# Altium PCB chipshouter-pico-panel.PcbDoc
Units mil, origin at the board's own origin, x right, y up, seen from the top; angles counter-clockwise.
Board outline 7944.88 x 5314.96 mil, 2 copper layers (Top Layer, Bottom Layer); 9 components, 0 nets, 64 pads, 0 vias.
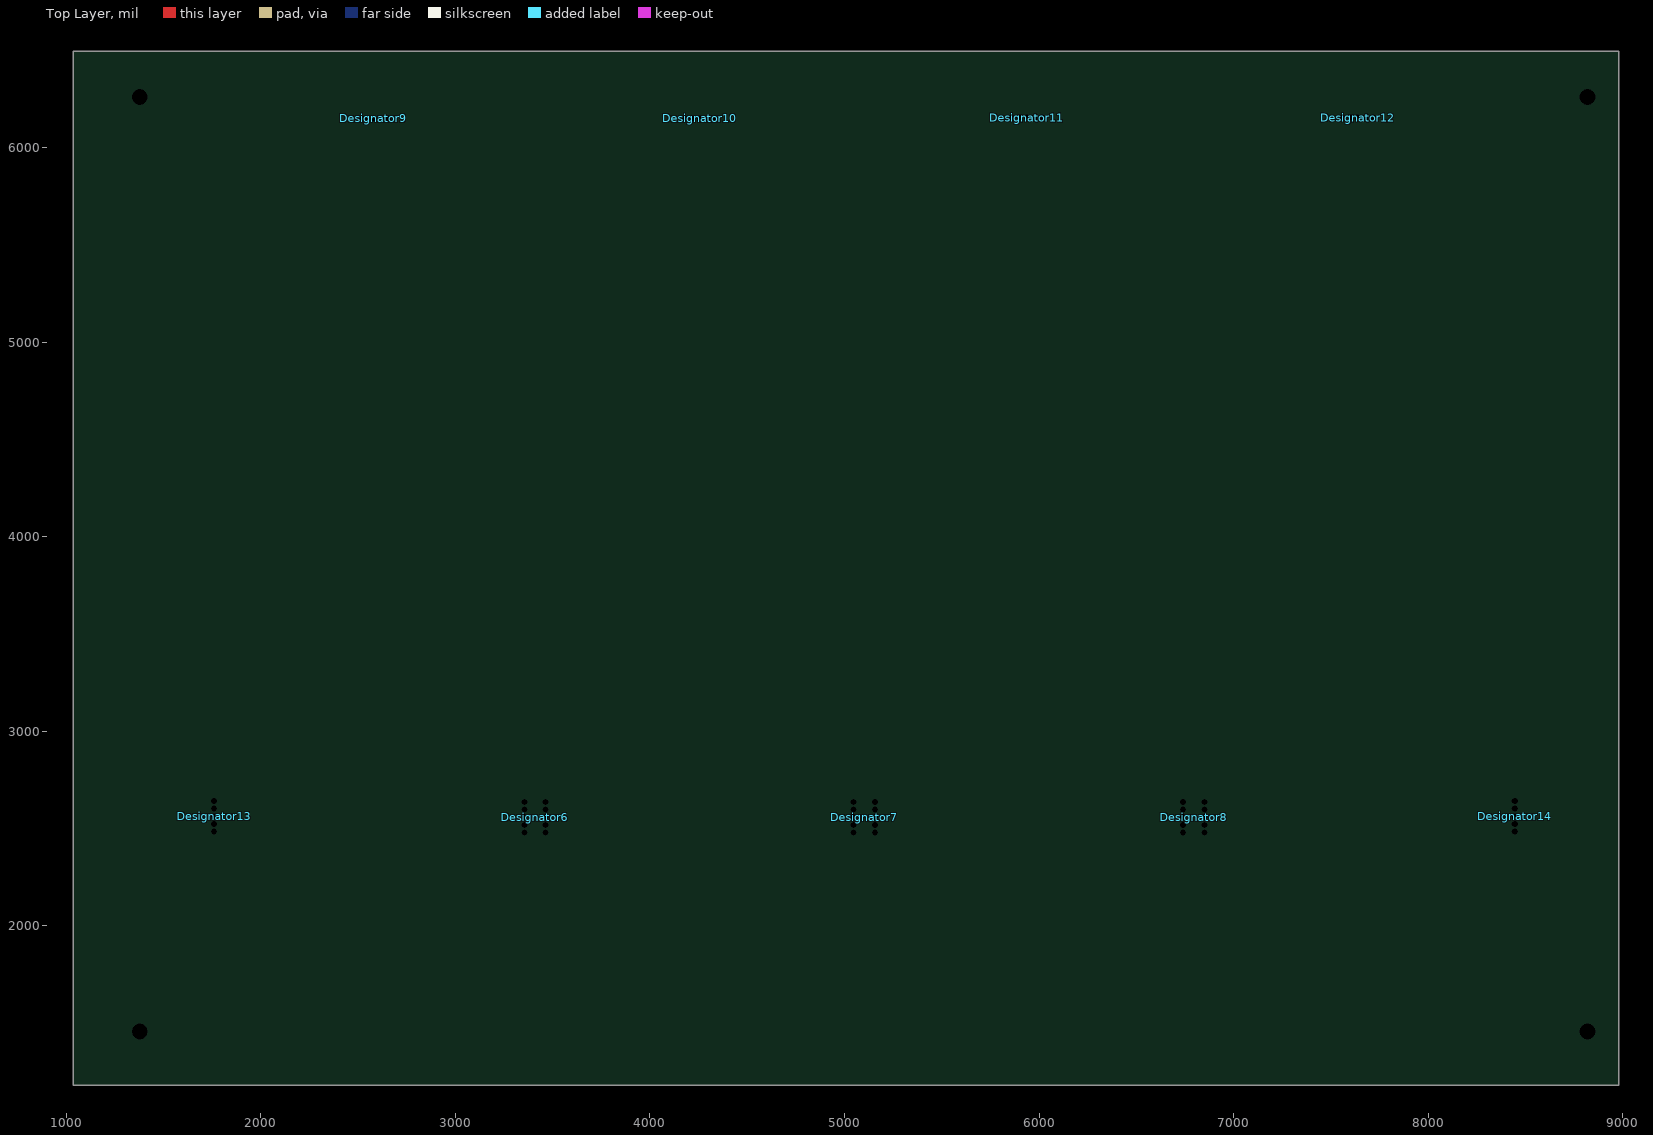
[diagram p0: Top Layer view]
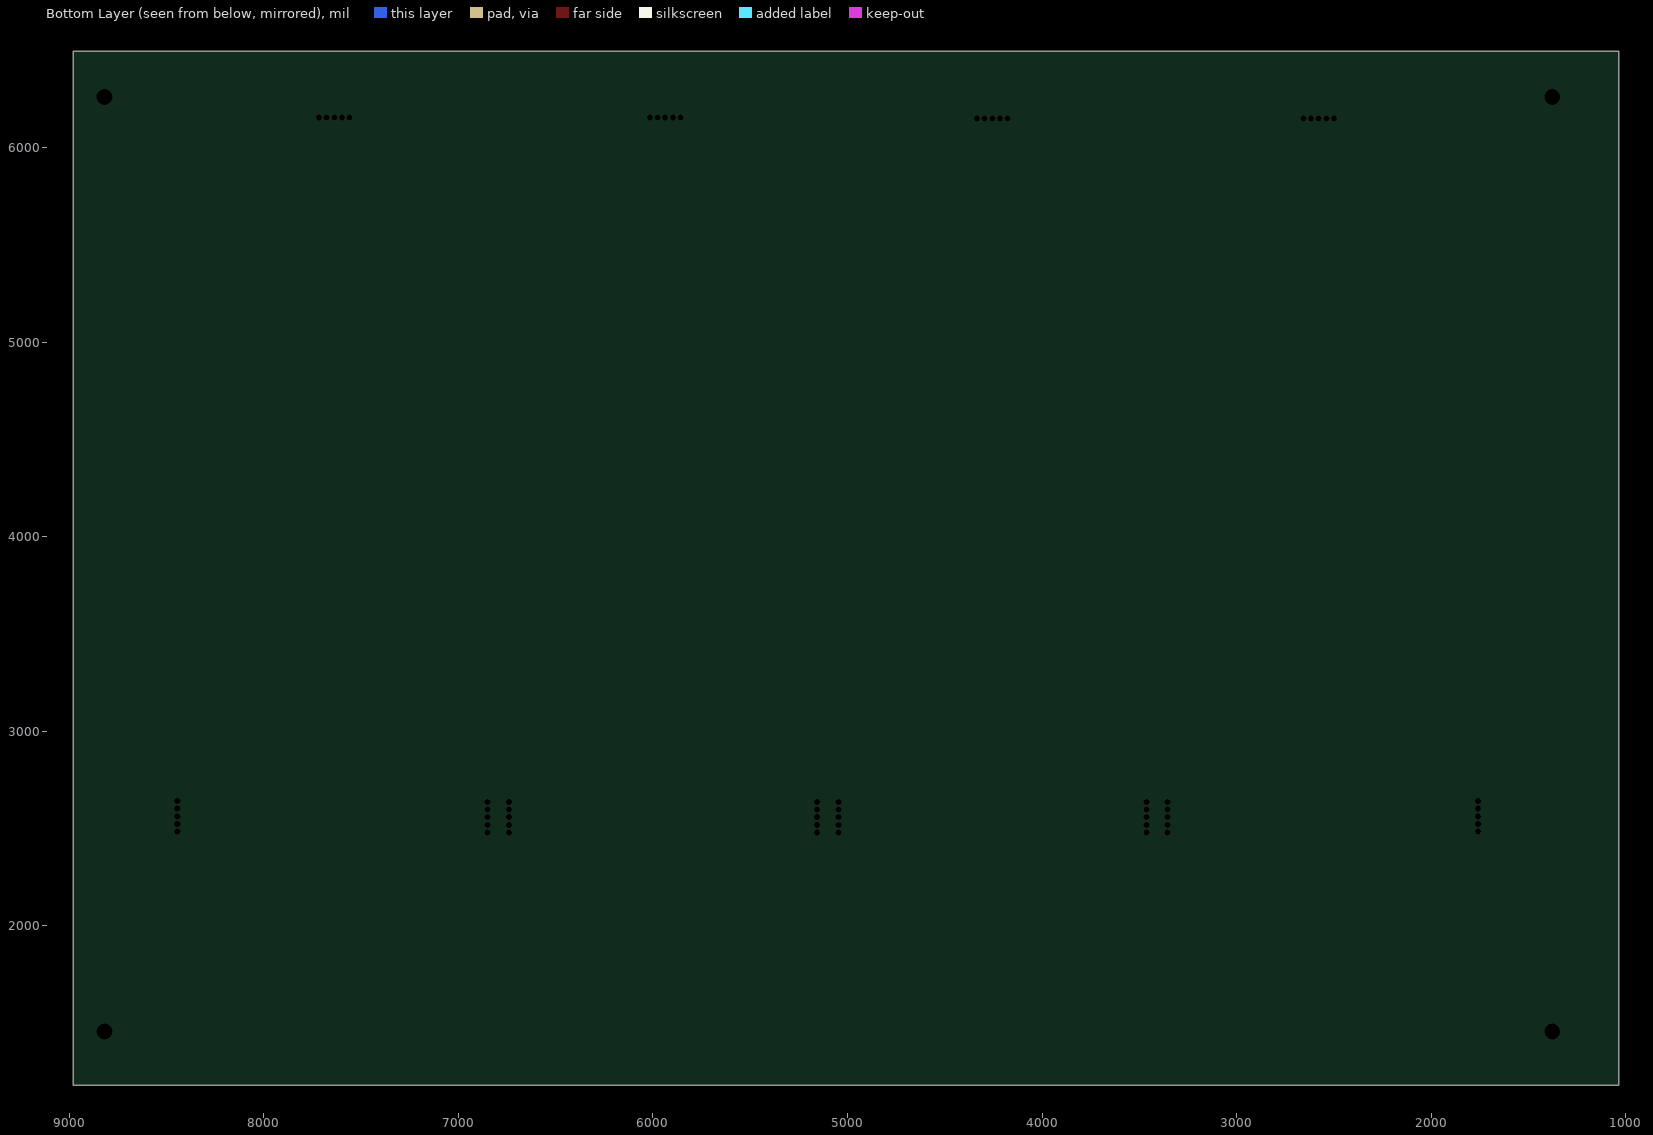
[diagram p1: Bottom Layer view, seen from below]

## Layer stack, top to bottom
Top Solder: solder mask 0.4, Solder Resist, Dk 3.5
Top Layer: signal copper 1.4
Dielectric 1: dielectric 12.6, FR-4, Dk 4.8
Bottom Layer: signal copper 1.4
Bottom Solder: solder mask 0.4, Solder Resist, Dk 3.5

## Board outline
1035.43,1181.1 8980.32,1181.1 8980.32,6496.06 1035.43,6496.06

## Design rules (kind name [scope] priority, off if disabled: settings)
Clearance [All] p1: gap=10 ignorepadtopadclearanceinfootprint=FALSE except(0: Arc-Hole Track-Hole SMDPad-Hole THPad-Hole Via-Hole Fill-Hole Poly-Hole Region-Hole Text-Hole)
PolygonConnect [All] p1: connectstyle=Relief reliefconductorwidth=10 reliefentries=4 polygonreliefangle="90 Angle" airgapwidth=10
RoutingVias [All] p1: holewidth=28 width=50 viastyle="Through Hole" minholewidth=28 minwidth=50 maxholewidth=28 maxwidth=50
SolderMaskExpansion [All] p1: expansion=4 istentingtop=FALSE
Width [All] p1: maxlimit=10 minlimit=10 preferedwidth=10
30 further rules are at their usual default settings.

## Components (designator, comment, footprint, x,y, rotation, side; value= is the part's Value field where it differs from the comment)
Designator6 "Comment" DBLSIDED_6MMGAP_3MMROUTE 3464.57,2480.32 r90 top
Designator7 "Comment" DBLSIDED_6MMGAP_3MMROUTE 5157.48,2480.32 r90 top
Designator8 "Comment" DBLSIDED_6MMGAP_3MMROUTE 6850.39,2480.32 r90 top
Designator9 "Comment" SNGSIDED_6MMGAP_3MMROUTE 2500,6149.61 r0 top
Designator10 "Comment" SNGSIDED_6MMGAP_3MMROUTE 4177.17,6149.61 r0 top
Designator11 "Comment" SNGSIDED_6MMGAP_3MMROUTE 5858.27,6153.54 r0 top
Designator12 "Comment" SNGSIDED_6MMGAP_3MMROUTE 7559.06,6153.54 r0 top
Designator13 "Comment" SNGSIDED_6MMGAP_3MMROUTE 1759.84,2484.25 r90 top
Designator14 "Comment" SNGSIDED_6MMGAP_3MMROUTE 8444.88,2484.25 r90 top

## Footprints (in the part's own frame and the unit in brackets; to place one, negate y for a bottom-side part, rotate by r counter-clockwise, add the part's x,y. Pads: shape width x height; smd on the part's side, far side on the other; paste and mask are expansions set on the pad)
DBLSIDED_6MMGAP_3MMROUTE [mm]
  rect 0x0 hole 0.787 unplated: 1(0,2.8) 1(0,0) 2(1,2.8) 2(1,0) 3(2,0) 3(2,2.8) 3(3,0) 3(3,2.8) 3(4,0) 3(4,2.8)
SNGSIDED_6MMGAP_3MMROUTE [mm]
  rect 0x0 hole 0.787 unplated: 1(0,0) 2(1,0) 3(2,0) 3(3,0) 3(4,0)

## Part data
Designator6 Designator7 Designator8 Designator9 Designator10 Designator11 Designator12 Designator13 Designator14: library part DSS13UTR

## Free pads (board coordinates)
  round 0 hole 80.71: B_MH5(1377.95,6259.84) B_MH7(1377.95,1456.69) B_MH7(8818.9,1456.69) B_MH7(8818.9,6259.84)

## Nets (pads, with @x,y where several pads share a name; then routed paths per layer and width w, separated by ;. In a path a pad name is that pad's centre, name@x,y a point inside that pad or via, vN(x,y) a via of type N, cw(c..) or ccw(c..) an arc to the next point about the centre after c; other vN are vias at no path point)
pads on no net: Designator6.1 Designator6.2 Designator6.3 Designator7.1 Designator7.2 Designator7.3 Designator8.1 Designator8.2 Designator8.3 Designator9.1 Designator9.2 Designator9.3 Designator10.1 Designator10.2 Designator10.3 Designator11.1 Designator11.2 Designator11.3 Designator12.1 Designator12.2 Designator12.3 Designator13.1 Designator13.2 Designator13.3 Designator14.1 Designator14.2 Designator14.3

## Silkscreen, mask and mechanical layers (free items; w line width, h text height)
M18: Panel Outline:
  lines w10: 2100,2090 2100,3537 2149,3537 2149,2090 2100,2090 ; 2136,3565 2136,3691 2193,3691 2193,3565 2136,3565 ; 2939,3566 2939,3681 2995,3681 2995,3566 2939,3566 ; 2983,2089 2983,3537 3033,3537 3033,2089 2983,2089 ; 3795,2090 3844,2090 3844,3537 3795,3537 3795,2090 ; 3831,3565 3888,3565 3888,3691 3831,3691 3831,3565 ; 4634,3566 4690,3566 4690,3681 4634,3681 4634,3566 ; 4678,2089 4728,2089 4728,3537 4678,3537 4678,2089 ; 5490,2090 5539,2090 5539,3537 5490,3537 5490,2090 ; 5526,3565 5583,3565 5583,3691 5526,3691 5526,3565 ; 6329,3566 6385,3566 6385,3681 6329,3681 6329,3566 ; 6373,2089 6423,2089 6423,3537 6373,3537 6373,2089 ; 7184,2090 7233,2090 7233,3537 7184,3537 7184,2090 ; 7220,3565 7277,3565 7277,3691 7220,3691 7220,3565 ; 8023,3566 8079,3566 8079,3681 8023,3681 8023,3566 ; 8067,2089 8117,2089 8117,3537 8067,3537 8067,2089
  lines w20: 1035.43,1181.1 1035.43,6496.06 8980.32,6496.06 8980.32,1181.1 1035.43,1181.1
Route Tool Path:
  drawing of 160 lines, arcs and shapes, not listed

## Panel: embedded boards
"chipshouter-pico.PcbDoc" at 1771.65,1574.8, 1 rows x 4 columns, spacing 2500 x 1694.88, rotation 0